# EAGLE board BOTTOM_BRD_v.1.0.5_a (EAGLE 9.6.2)
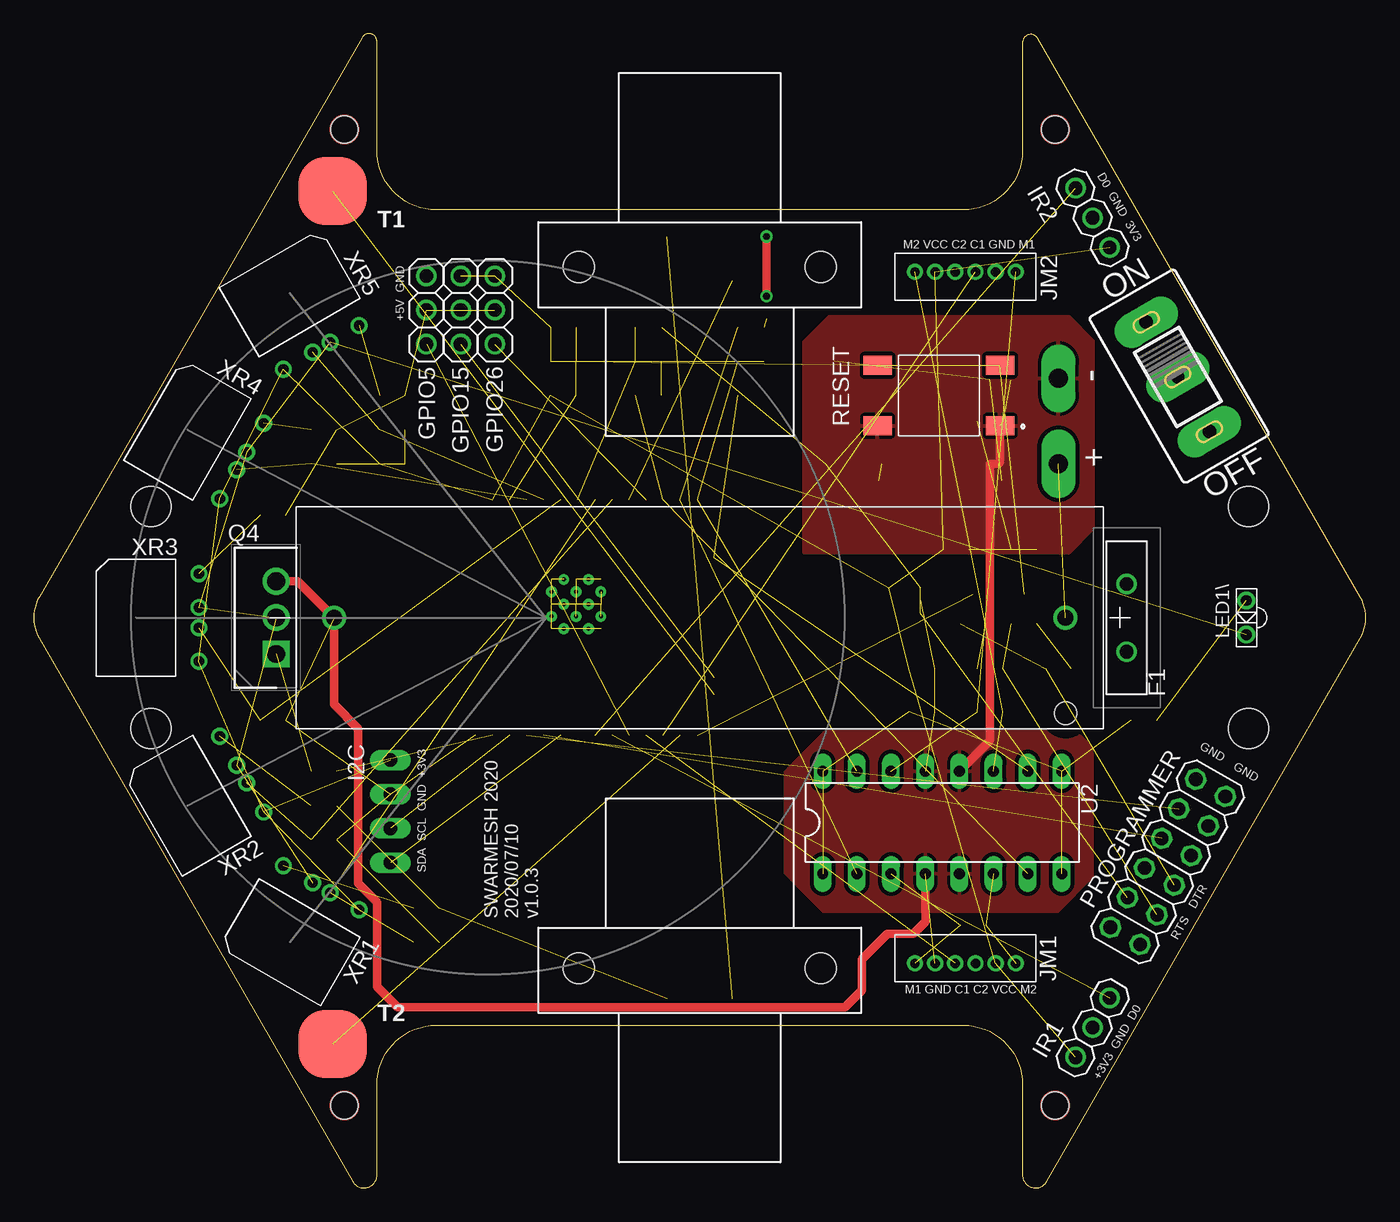
[diagram p0: board, top side]
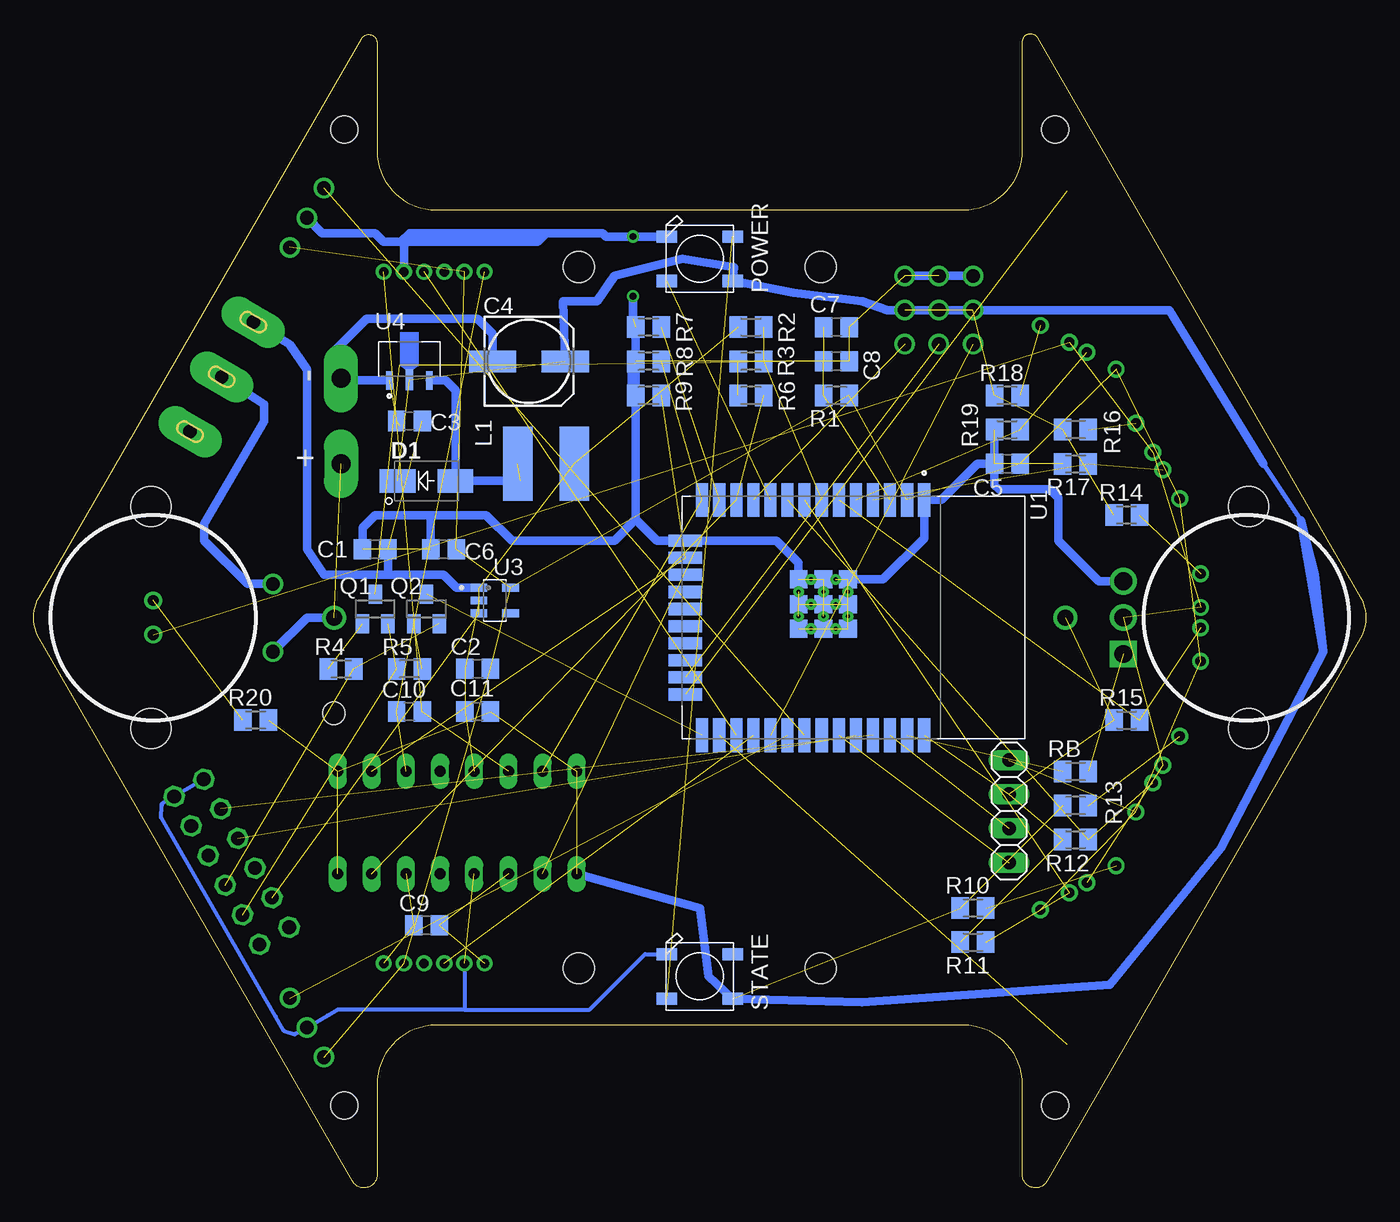
[diagram p1: board, bottom side, seen from below]

Size 99.06 x 85.8 mm. Coordinates in mm from the lower left corner, seen from the top.
Outline: 75.33,0.48 98.65,40.87 arc60 98.65,43.91 74.68,85.43 arc150 73.53,85.12 73.53,77.1 arc-90 69.12,72.69 29.94,72.69 arc-90 25.53,77.1 25.53,85.2 arc150 24.42,85.5 0.41,43.91 arc60 0.41,40.87 23.73,0.48 arc150 25.53,0.97 25.53,7.68 arc-90 29.94,12.09 69.12,12.09 arc-90 73.53,7.68 73.53,0.97 arc150 75.33,0.48
Copper layers (1*16): Top 0.035mm / dielectric 0.15mm / Bottom 0.035mm
Design rules "default *": minimum track width 12mil, minimum drill 0.5mm, track to track 12mil, track to pad 12mil, pad to pad 12mil, via to via 20mil, smd to smd 12mil, copper to edge 40mil, drill to drill 25mil, minimum pad ring 10mil, minimum via ring 8mil, stop-mask expansion 4mil, vias tented up to drill 0mil, thermal gap 10mil
Holes 2 mm at 75.96,78.66 23.11,78.66 23.11,6.12 75.96,6.12
Holes 3 mm at 8.73,50.64 8.73,34.14 90.33,50.64 90.33,34.14
Holes 2.3 mm at 58.53,16.33 40.53,16.33 40.53,68.45 58.53,68.45
tKeepout: area 74.3,77 to 77.6,80.3; area 21.5,77 to 24.7,80.3; area 21.5,4.5 to 24.7,7.7; area 74.3,4.5 to 77.6,7.7
tRestrict: area 30.8,33.4 to 49.8,51.3

## Footprints (pad centres in the part's own frame; a part is rotated, then mirrored left to right if it is on the bottom)
BAT_6S-AA = drill 1.19: + -27.2,0; - 27.2,0 | hole 1.67: -27.2,7.1
C0805 = smd 1.3 x 1.5: 1 -0.95,0; 2 0.95,0
153CLV-0605 = smd 3.5 x 1.6: + 2.7,0; - -2.7,0
WS2812B = smd 1.5 x 0.9: 1-VDD 2.45,-1.65; 2-DOUT 2.45,1.65; 3-GND -2.45,1.65; 4-DIN -2.45,-1.65
1X1-BIGPOGO = drill 1.4 pad 2.54 long: P$1 0,0
DO214 = smd 2.65 x 1.75: ANODE -2.15,0; CATHODE 2.15,0
RUEF300K2 = drill 1.01 pad 1.515: 1 0,0; 2 5.05,0
1X03 = drill 1.016: 1 -2.54,0; 2 0,0; 3 2.54,0
1X04 = drill 1.016 long: 1 -3.81,0; 2 -1.27,0; 3 1.27,0; 4 3.81,0
B6B-ZR = drill 0.7: 1 9,-1.3; 2 7.5,-1.3; 3 6,-1.3; 4 4.5,-1.3; 5 3,-1.3; 6 1.5,-1.3
INDP5858X480N = smd 2.2 x 5.5: 1 -2.1,0; 2 2.1,0
LTE-302 = drill 0.8: A 1.27,0; C -1.27,0
2X06 = drill 1.016 octagon: 1 -6.35,-1.27; 2 -6.35,1.27; 3 -3.81,-1.27; 4 -3.81,1.27; 5 -1.27,-1.27; 6 -1.27,1.27; 7 1.27,-1.27; 8 1.27,1.27; 9 3.81,-1.27; 10 3.81,1.27; 11 6.35,-1.27; 12 6.35,1.27
SOT23 = smd 1 x 1.4: 1 -0.95,-1.1; 2 0.95,-1.1; 3 0,1.1
TO270P460X1020X2008-3P = drill 1.32 pad 1.98 square: 1 0,0 | drill 1.32 pad 1.98: 2 2.7,0; 3 5.4,0
M0805 = smd 1.3 x 1.6: 1 -0.95,0; 2 0.95,0
SW_2-1437565-9 = smd 2.1 x 1.4: 1 -4.55,2.25; 2 4.55,2.25; 3 -4.55,-2.25; 4 4.55,-2.25
CS12ANW03 = drill 1 pad 2.54 long: A -4.674,0; B 4.724,0; C 0.025,0
SPRING-CONNECTOR = smd 5.08 x 5.08: P$2 0,0
MODULE_ESP32-WROOM-32D = smd 2.5 x 0.9: 1 -8.75,5.26; 2 -8.75,3.99; 3 -8.75,2.72; 4 -8.75,1.45; 5 -8.75,0.18; 6 -8.75,-1.09; 7 -8.75,-2.36; 8 -8.75,-3.63; 9 -8.75,-4.9; 10 -8.75,-6.17; 11 -8.75,-7.44; 12 -8.75,-8.71; 13 -8.75,-9.98; 14 -8.75,-11.25; 25 8.75,-11.25; 26 8.75,-9.98; 27 8.75,-8.71; 28 8.75,-7.44; 29 8.75,-6.17; 30 8.75,-4.9; 31 8.75,-3.63; 32 8.75,-2.36; 33 8.75,-1.09; 34 8.75,0.18; 35 8.75,1.45; 36 8.75,2.72; 37 8.75,3.99; 38 8.75,5.26 | smd 0.9 x 2.5: 15 -5.715,-12.5; 16 -4.445,-12.5; 17 -3.175,-12.5; 18 -1.905,-12.5; 19 -0.635,-12.5; 20 0.635,-12.5; 21 1.905,-12.5; 22 3.175,-12.5; 23 4.445,-12.5; 24 5.715,-12.5 | smd 1.33 x 1.33: 39_1 -2.835,-0.405; 39_2 -1,-0.405; 39_3 0.835,-0.405; 39_4 -2.835,-2.24; 39_5 -1,-2.24; 39_6 0.835,-2.24; 39_7 -2.835,-4.075; 39_8 -1,-4.075; 39_9 0.835,-4.075 | drill 0.3 pad 0.4: 39_10 -1.917,-0.405; 39_11 -0.083,-0.405; 39_12 -2.835,-1.323; 39_13 -1,-1.323; 39_14 0.835,-1.323; 39_15 -1.917,-2.24; 39_16 -0.083,-2.24; 39_17 -2.835,-3.158; 39_18 -1,-3.158; 39_19 0.835,-3.158; 39_20 -1.917,-4.075; 39_21 -0.083,-4.075
DIL16 = drill 0.813 long: 1 -8.89,-3.81; 2 -6.35,-3.81; 3 -3.81,-3.81; 4 -1.27,-3.81; 5 1.27,-3.81; 6 3.81,-3.81; 7 6.35,-3.81; 8 8.89,-3.81; 9 8.89,3.81; 10 6.35,3.81; 11 3.81,3.81; 12 1.27,3.81; 13 -1.27,3.81; 14 -3.81,3.81; 15 -6.35,3.81; 16 -8.89,3.81
SOT95P285X140-5N = smd 1.35 x 0.6: 1 -1.185,0.95; 2 -1.185,0; 3 -1.185,-0.95; 4 1.185,-0.95; 5 1.185,0.95
REG_MCP1702T-3302E/MB = smd 1.4 x 0.48: 1 -1.425,1.5; 3 -1.425,-1.5 | smd 1.525 x 0.56: 2 -1.365,0
XDCR_TCRT1000 = drill 0.75 pad 1.1: A -3.25,4.67; CATH -0.75,4.67; COLL 3.25,4.67; E 0.75,4.67

## Placement (x,y rotation side)
BT  3.7V-BAT  [BAT_6S-AA]  49.53,42.39 180 top
C1  22uF  [C0805]  73.66,47.47 180 bottom
C2  22uF  [C0805]  66.04,38.58 180 bottom
C3  100nF  [C0805]  71.12,57 180 bottom
C4  100uF  [153CLV-0605]  62.23,61.44 0 bottom
C5  22uF  [C0805]  26.67,53.82 180 bottom
C6  100nF  [C0805]  68.58,47.47 180 bottom
C7  100nF  [C0805]  39.37,63.98 0 bottom
C8  100nF  [C0805]  39.37,61.44 180 bottom
C9  100nF  [C0805]  69.85,19.53 180 bottom
C10  100nF  [C0805]  71.12,35.41 180 bottom
C11  100nF  [C0805]  66.04,35.41 180 bottom
CHARGING  WS2812B5050  [WS2812B]  49.53,69.06 0 bottom
CHG+  [1X1-BIGPOGO]  76.2,53.82 270 bottom
CHG-  [1X1-BIGPOGO]  76.2,60.17 90 top
D1  SS14  [DO214]  69.85,52.55 180 bottom
F1  RUEF300K-2  [RUEF300K2]  81.28,39.85 90 top
GPIO5  [1X03]  29.21,65.25 90 top
GPIO15  [1X03]  31.75,65.25 90 top
GPIO26  [1X03]  34.29,65.25 90 top
I2C  [1X04]  26.53,27.99 270 bottom
IR1  [1X03]  78.74,11.91 60 top
IR2  [1X03]  78.74,72.11 120 top
JM1  B6B-ZR  [B6B-ZR]  74.53,15.39 180 top
JM2  B6B-ZR  [B6B-ZR]  64.03,69.39 0 top
L1  47uH  [INDP5858X480N]  60.96,53.82 180 bottom
LED1\  LTE-302  [LTE-302]  90.17,42.39 90 top
PROGRAMMER  [2X06]  84.34,24.24 60 top
Q1  SS8050  [SOT23]  73.66,43.03 0 bottom
Q2  SS8050  [SOT23]  69.85,43.03 0 bottom
Q4  TIP122  [TO270P460X1020X2008-3P]  18.03,39.69 90 top
R1  10k  [M0805]  39.37,58.9 0 bottom
R2  47k  [M0805]  45.72,63.98 180 bottom
R3  10k  [M0805]  45.72,61.44 0 bottom
R4  10k  [M0805]  76.2,38.58 180 bottom
R5  10k  [M0805]  71.12,38.58 0 bottom
R6  10k  [M0805]  45.72,58.9 0 bottom
R7  10k  [M0805]  53.34,63.98 0 bottom
R8  10k  [M0805]  53.34,61.44 0 bottom
R9  10k  [M0805]  53.34,58.9 0 bottom
R10  10  [M0805]  29.21,20.8 0 bottom
R11  10k  [M0805]  29.21,18.26 180 bottom
R12  10  [M0805]  21.59,28.42 0 bottom
R13  10k  [M0805]  21.59,25.88 180 bottom
R14  10  [M0805]  17.78,50.01 0 bottom
R15  10k  [M0805]  17.78,34.77 180 bottom
R16  10  [M0805]  21.59,56.36 0 bottom
R17  10k  [M0805]  21.59,53.82 180 bottom
R18  10  [M0805]  26.67,58.9 0 bottom
R19  10k  [M0805]  26.67,56.36 180 bottom
R20  10  [M0805]  82.55,34.77 0 bottom
RB  1k  [M0805]  21.59,30.96 180 bottom
S1  2-1437565-9  [SW_2-1437565-9]  67.31,58.9 180 top
STATE  WS2812B5050  [WS2812B]  49.53,15.72 0 bottom
SW1  CS12ANW03  [CS12ANW03]  85.06,60.3 300 top
T1  [SPRING-CONNECTOR]  22.23,74.09 0 top
T2  [SPRING-CONNECTOR]  22.23,10.69 0 top
U1  ESP32-WROOM-32D  [MODULE_ESP32-WROOM-32D]  38.1,42.39 270 bottom
U2  L293D  [DIL16]  67.56,27.15 0 top
U3  AP2112K-3.3  [SOT95P285X140-5N]  64.77,43.66 0 bottom
U4  CE8301  [REG_MCP1702T-3302E/MB]  71.12,61.44 90 bottom
XR1  TCRT1000  [XDCR_TCRT1000]  19.05,18.26 330 top
XR2  TCRT1000  [XDCR_TCRT1000]  11.43,28.42 300 top
XR3  TCRT1000  [XDCR_TCRT1000]  7.62,42.39 270 top
XR4  TCRT1000  [XDCR_TCRT1000]  11.43,56.36 240 top
XR5  TCRT1000  [XDCR_TCRT1000]  19.05,66.52 210 top

## Library data of the parts
BT = 6S-AA; AVAILABILITY: Unavailable; DESCRIPTION: BATTERY HOLDER AA PC PIN; DIGIKEY-PURCHASE-URL: https://snapeda.com/shop?store=DigiKey&id=4389101; MF: MPD; MP: 6S-AA; PACKAGE: None; PRICE: None
C1-C11 = rcl; SPICEPREFIX: C
CHARGING CHG+ CHG- GPIO5 GPIO15 GPIO26 IR1 IR2 STATE = adafruit
D1 = SS14; AVAILABILITY: Unavailable; DESCRIPTION: Diode Schottky 40V 1A Surface Mount SMA (DO-214AC); DIGIKEY-PURCHASE-URL: https://snapeda.com/shop?store=DigiKey&id=229686; MF: ON Semiconductor; MP: SS14; PACKAGE: DO-214AC-214 ON Semiconductor; PRICE: None
F1 = RUEF300K-2; DESCRIPTION: TE CONNECTIVITY / RAYCHEM - RUEF300K-2 - RESETTABLE FUSE, PTC, 30V, 3A, RADIAL; HEIGHT: 16.5mm; MANUFACTURER_NAME: TE CONNECTIVITY / RAYCHEM; MANUFACTURER_PART_NUMBER: RUEF300K-2
I2C PROGRAMMER = pinhead
JM1 JM2 = B6B-ZR; AVAILABILITY: Unavailable; DESCRIPTION: Connector Header Surface Mount 6 position 0.059 _1.50mm_; MF: JST; MP: B6B-ZR; PACKAGE: None; PRICE: None
L1 = SDR0604-100KL; AVAILABILITY: Unavailable; DESCRIPTION: 10µH Unshielded Wirewound Inductor Nonstandard; MF: Bourns; MP: SDR0604-100KL; PACKAGE: Nonstandard Bourns; PRICE: None
LED1\ = LTE-302; DESCRIPTION: Infrared (IR) Emitter 940nm 1.2V 50mA 0.662mW/sr @ 20mA 40° Radial, Side View; DIGI-KEY_PART_NUMBER: 160-1930-ND; MF: Lite-On Inc.; MP: LTE-302; PACKAGE: Radial Lite-On
Q1 Q2 = transistor
Q4 = TIP122; DESCRIPTION: TIP122, Darlington Transistor, NPN 8 A 100 V HFE:1000, 3-Pin, TO-220; HEIGHT: 4.6mm; MANUFACTURER_NAME: STMicroelectronics; MANUFACTURER_PART_NUMBER: TIP122; MOUSER_PART_NUMBER: 511-TIP122; MOUSER_PRICE-STOCK: https://www.mouser.com/Search/Refine.aspx?Keyword=511-TIP122
R1-R20 RB = rcl; SPICEPREFIX: R
S1 = pushswitch; AVAILABILITY: Unavailable; COMMENT: 2-1437565-9; DESCRIPTION: Tactile Switch SPST-NO Top Actuated Surface Mount; MF: TE Connectivity; MP: 2-1437565-9; PACKAGE: SMD-6 Omron Electronics; PRICE: None
SW1 = SWITCH_C; AVAILABILITY: Unavailable; DESCRIPTION: Slide Switch SPDT Through Hole; DIGIKEY-PURCHASE-URL: https://snapeda.com/shop?store=DigiKey&id=478299; MF: NKK Switches; MP: CS12ANW03; PACKAGE: None; PRICE: None
T1 T2 = Touch_Pad; SF_ID: PRT-11822
U1 = ESP32-WROOM-32D; AVAILABILITY: Unavailable; DESCRIPTION: Bluetooth, WiFi 802.11b/g/n, Bluetooth v4.2 +EDR, Class 1, 2 and 3 Transceiver Module 2.4GHz ~ 2.5GHz Integrated, Trace Surface Mount; MF: Espressif Systems; MP: ESP32-WROOM-32D; PACKAGE: Module Espressif Systems; PRICE: None
U2 = st-microelectronics; MPN: L293D; OC_FARNELL: 9589619; OC_NEWARK: 56P8249
U3 = AP2112K-3.3TRG1; AVAILABILITY: Unavailable; DESCRIPTION: Linear Voltage Regulator IC 1 Output 600mA SOT-25; MF: Diodes Inc.; MP: AP2112K-3.3TRG1; PACKAGE: SOT-753 Diodes Inc.; PRICE: None
U4 = MCP1702T-3302E_MB; AVAILABILITY: Unavailable; DESCRIPTION: Linear Voltage Regulator IC 1 Output 250mA SOT-89-3; MF: Microchip; MP: MCP1702T-3302E/MB; PACKAGE: SOT-89 Microchip; PRICE: None
XR1-XR5 = ST188; AVAILABILITY: Unavailable; DESCRIPTION: Reflective Optical Sensor 0.157 (4mm) PCB Mount; MF: Vishay; MP: TCRT1000; PACKAGE: PCB Mount Vishay; PRICE: None

## Nets
3V3: PROGRAMMER.1
4V2: PROGRAMMER.2
+3V3: C2.1 C5.1 C6.1 I2C.1 IR1.1 IR2.1 JM1.5 JM2.5 R1.2 U1.2 U3.5 XR1.COLL XR2.COLL XR3.COLL XR4.COLL XR5.COLL
+5V: C4.+ C11.1 CHARGING.1-VDD D1.CATHODE GPIO5.2 GPIO15.2 GPIO26.2 R10.1 R12.1 R14.1 R16.1 R18.1 R20.2 STATE.1-VDD U2.1 U2.8 U2.9 U2.16 U4.2
BATLVL: R2.1 R3.2 U1.7
CTS: PROGRAMMER.9
DSR: PROGRAMMER.7
DTR: PROGRAMMER.5 Q2.2 R4.1
E1A: JM1.3 U1.28
E2A: JM2.3 U1.27
EN: C7.1 C8.2 Q1.3 R1.1 S1.3 S1.4 U1.3
GND: BT.- C1.2 C2.2 C3.2 C4.- C5.2 C6.2 C7.2 C8.1 C11.2 CHARGING.3-GND CHG-.P$1 GPIO5.3 GPIO15.3 GPIO26.3 I2C.2 IR1.2 IR2.2 JM1.2 JM2.2 PROGRAMMER.11 PROGRAMMER.12 Q4.3 R3.1 R6.1 R7.1 R8.1 R9.1 R11.2 R13.2 R15.2 R17.2 R19.2 S1.1 S1.2 STATE.3-GND U1.1 U1.15 U1.38 U1.39_1 U1.39_2 U1.39_3 U1.39_4 U1.39_5 U1.39_6 U1.39_7 U1.39_8 U1.39_9 U1.39_10 U1.39_11 U1.39_12 U1.39_13 U1.39_14 U1.39_15 U1.39_16 U1.39_17 U1.39_18 U1.39_19 U1.39_20 U1.39_21 U2.4 U2.5 U2.12 U2.13 U3.2 U4.1
IO0: Q2.3 U1.25
IO5: GPIO5.1 U1.29
IO12: R8.2 U1.14 U2.15
IO13: R9.2 U1.16 U2.10
IO14: R7.2 U1.13 U2.2
IO15: GPIO15.1 U1.23
IO26: GPIO26.1 U1.11
IO27: R6.2 U1.12 U2.7
IO32: R11.1 U1.8 XR1.E
IO33: R13.1 U1.9 XR2.E
IO34: R15.1 U1.6 XR3.E
IO36: R17.1 U1.4 XR4.E
IO39: R19.1 U1.5 XR5.E
IR1: IR1.3 U1.30
IR2: IR2.3 U1.31
IRTX: RB.2 U1.37
LEDS: CHARGING.4-DIN U1.10
M1A: C9.1 JM1.1 U2.3
M1B: C9.2 JM1.6 U2.6
M2A: C10.1 JM2.1 U2.14
M2B: C10.2 JM2.6 U2.11
N$1: BT.+ CHG+.P$1 F1.1
N$2: Q4.1 RB.1
N$3: F1.2 SW1.C
N$4: D1.ANODE L1.2 U4.3
N$5: U1.19
N$6: R12.2 XR2.A
N$7: R16.2 XR4.A
N$8: LED1\.C Q4.2 XR1.CATH XR2.CATH XR3.CATH XR4.CATH XR5.CATH
N$9: CHARGING.2-DOUT STATE.4-DIN
N$10: R14.2 XR3.A
N$11: R18.2 XR5.A
N$12: Q1.1 R4.2
N$13: R10.2 XR1.A
N$14: LED1\.A R20.1
N$15: Q2.1 R5.2
N$16: U1.20
N$18: U1.21
N$23: U1.22
N$24: U1.17
N$25: U1.18
RTS: PROGRAMMER.3 Q1.2 R5.1
RXD: PROGRAMMER.10 U1.35
SCL: I2C.3 U1.36
SDA: I2C.4 U1.33
TOUCH1: T1.P$2 U1.24
TOUCH2: T2.P$2 U1.26
TXD: PROGRAMMER.8 U1.34
V0: PROGRAMMER.6
VCC: C1.1 C3.1 L1.1 PROGRAMMER.4 R2.2 SW1.A U3.1 U3.3

## Tracks (layer width: path | path; a pad name or v marks a point on that pad's centre or on a via)
+3V3  (15 unrouted)
+5V  (14 unrouted)
  Bottom 0.381: 7.62,53.82 4.83,49.63
  Bottom 0.635: 7.62,53.82 14.6,65.25 GPIO26.2 35.56,65.25 37.46,65.89 42.54,66.52 CHARGING.1-VDD 46.99,68.43 50.8,69.06 55.88,67.79 57.15,65.89 59.69,65.89 C4.+ | 3.17,39.85 3.81,45.57 4.83,49.63 3.17,39.85 | 3.17,39.85 10.79,25.25 19.05,15.09 37.46,13.82 STATE.1-VDD 48.89,15.72 49.53,20.8 U2.1
BATLVL  (2 unrouted)
DTR  (2 unrouted)
E1A  (1 unrouted)
E2A  (1 unrouted)
EN  (6 unrouted)
GND  (via drill 0.5)  (41 unrouted)
  Top 0.635: Q4.3 19.63,45.09 BT.- 22.33,35.94 24.13,34.14 24.13,22.65 25.54,21.24 25.54,14.94 27.06,13.42 60.32,13.42 61.59,14.69 61.59,16.99 63.5,18.9 65.4,18.9 66.29,19.79 U2.4 | U2.12 71.12,33.25 71.12,53.82 71.75,53.82 71.86,53.93 S1.1 | v54.48,66.27 v54.48,70.71
  Bottom 0.305: PROGRAMMER.12 88.45,29.19 | 88.45,29.19 PROGRAMMER.11 | 67.06,13.26 57.71,13.26 53.59,17.37 STATE.3-GND | JM1.2 67.03,13.28 67.06,13.26 | 67.06,13.26 76.45,13.26 77.22,12.8 IR1.2 79.63,11.41 80.46,11.69 81.05,12.73 | 81.05,12.73 89.58,27.53 89.53,28.42 89.53,28.55 88.45,29.19 | 81.05,12.73
  Bottom 0.635: C5.2 28.89,53.82 31.57,51.14 U1.1 32.84,48.29 35.9,45.23 U1.39_1 | Q4.3 19.84,45.09 22.86,48.11 22.86,51.28 23.49,51.92 27.3,51.92 27.62,52.23 R19.2 | IR2.2 77.6,70.97 73.66,70.97 73.02,70.33 71.75,70.33 | JM2.2 71.53,70.11 71.3,70.33 | 71.3,70.33 71.75,70.33 | 71.3,70.33 65.4,70.33 | 65.4,70.33 61.59,70.33 | 60.96,70.97 56.77,70.97 56.52,70.71 | 71.3,70.33 70.67,70.97 | 70.67,70.97 64.77,70.97 | 62.23,70.97 60.96,70.97 | 70.67,70.97 71.12,70.97 71.75,70.33 | 64.77,70.97 65.4,70.33 | 61.59,70.33 62.23,70.97 | 62.23,70.97 64.77,70.97 | 60.96,70.97 61.59,70.33 | 56.52,70.71 v54.48,70.71 CHARGING.3-GND 52.07,70.62 | 55.88,70.71 56.51,70.71 56.52,70.71 | 54.61,61.44 R8.1 54.61,61.12 54.61,58.9 R9.1 | R9.1 54.29,49.69 | 54.29,49.69 52.7,48.11 U1.15 43.81,48.11 42.17,46.47 U1.39_7 | GPIO5.3 GPIO26.3 | U4.1 76.68,60.02 76.83,60.17 76.83,62.08 74.29,64.62 66.04,64.62 64.93,63.51 C4.- | C1.2 74.61,49.06 73.66,50.01 65.4,50.01 63.5,48.11 55.87,48.11 54.29,49.69 | 69.53,49.69 C6.2 | R9.1 R7.1 | v54.48,66.27 54.48,64.62
  pour Top: 59.17,64.74 76.96,64.74 78.74,62.97 78.74,49 76.96,47.22 57.31,47.22 57.31,62.89
  pour Top: 77.37,34.11 78.74,32.74 78.74,23.09 76.14,20.49 58.73,20.49 55.88,23.34 55.88,30.96 59.03,34.11
IO0  (1 unrouted)
IO5  (1 unrouted)
IO12  (2 unrouted)
IO13  (2 unrouted)
IO14  (2 unrouted)
IO15  (1 unrouted)
IO26  (1 unrouted)
IO27  (2 unrouted)
IO32  (2 unrouted)
IO33  (2 unrouted)
IO34  (2 unrouted)
IO36  (2 unrouted)
IO39  (2 unrouted)
IR1  (1 unrouted)
IR2  (1 unrouted)
IRTX  (1 unrouted)
LEDS  (1 unrouted)
M1A  (2 unrouted)
M1B  (2 unrouted)
M2A  (2 unrouted)
M2B  (2 unrouted)
N$1  (1 unrouted)
  Bottom 0.635: BT.+ 78.74,42.39 F1.1
N$2  (1 unrouted)
N$3
  Bottom 0.635: F1.2 83.15,44.9 86.36,48.11 86.36,49.38 81.91,57 81.91,58.27 SW1.C
N$4  (1 unrouted)
  Bottom 0.635: 62.86,52.55 D1.ANODE 67.7,59.29 68.42,60.02 U4.3
N$6  (1 unrouted)
N$7  (1 unrouted)
N$8  (6 unrouted)
N$9  (1 unrouted)
N$10  (1 unrouted)
N$11  (1 unrouted)
N$12  (1 unrouted)
N$13  (1 unrouted)
N$14  (1 unrouted)
N$15  (1 unrouted)
RTS  (2 unrouted)
RXD  (1 unrouted)
SCL  (1 unrouted)
SDA  (1 unrouted)
TOUCH1  (1 unrouted)
TOUCH2  (1 unrouted)
TXD  (1 unrouted)
VCC  (5 unrouted)
  Bottom 0.635: U3.1 67.62,44.61 68.58,45.57 72.77,45.57 | 72.77,45.57 77.47,45.57 78.74,47.47 78.74,60.81 80.01,62.71 SW1.A | C1.1 72.71,45.63 72.77,45.57
(copper drawn outside any net)
  shapes: Top circle x4

## Text on the board
tPlace: D0 GND 3V3 | M2 VCC C2 C1 GND M1 | ON | +5V GND | - | RESET | + | OFF | SDA SCL GND +3V3 | GND | GND | SWARMESH 2020 / 2020/07/10 / v1.0.3 | DTR | RTS | M1 GND C1 C2 VCC M2 | +3V3 GND D0
bPlace: POWER | - | +